# Altium PCB PCB1.PcbDoc
Units mm, origin at the board's own origin, x right, y up, seen from the top; angles counter-clockwise.
Board outline 14.99 x 25.02 mm, 2 copper layers (Top Layer, Bottom Layer); 18 components, 17 nets, 62 pads, 58 vias.
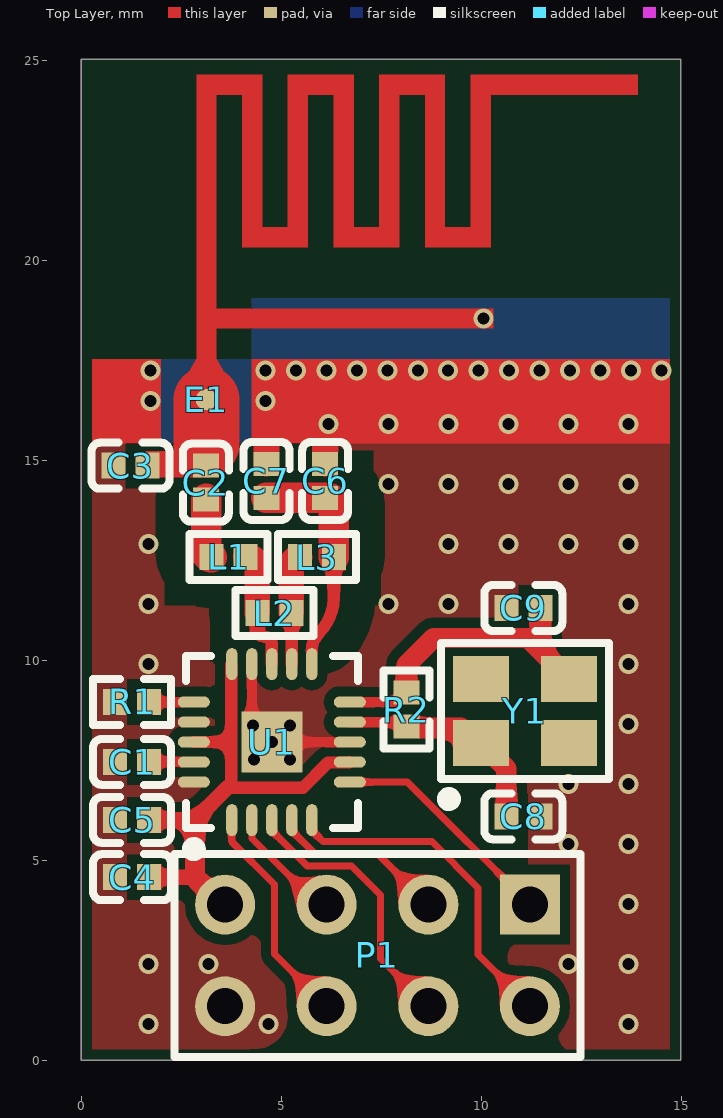
[diagram p0: Top Layer view]
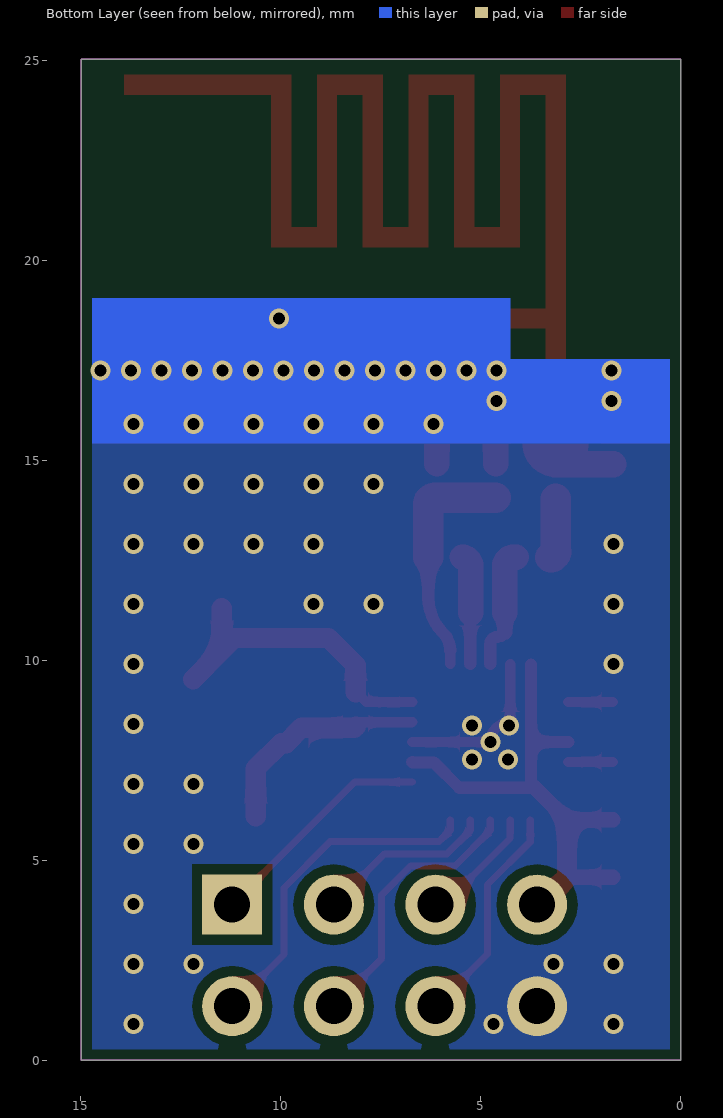
[diagram p1: Bottom Layer view, seen from below]
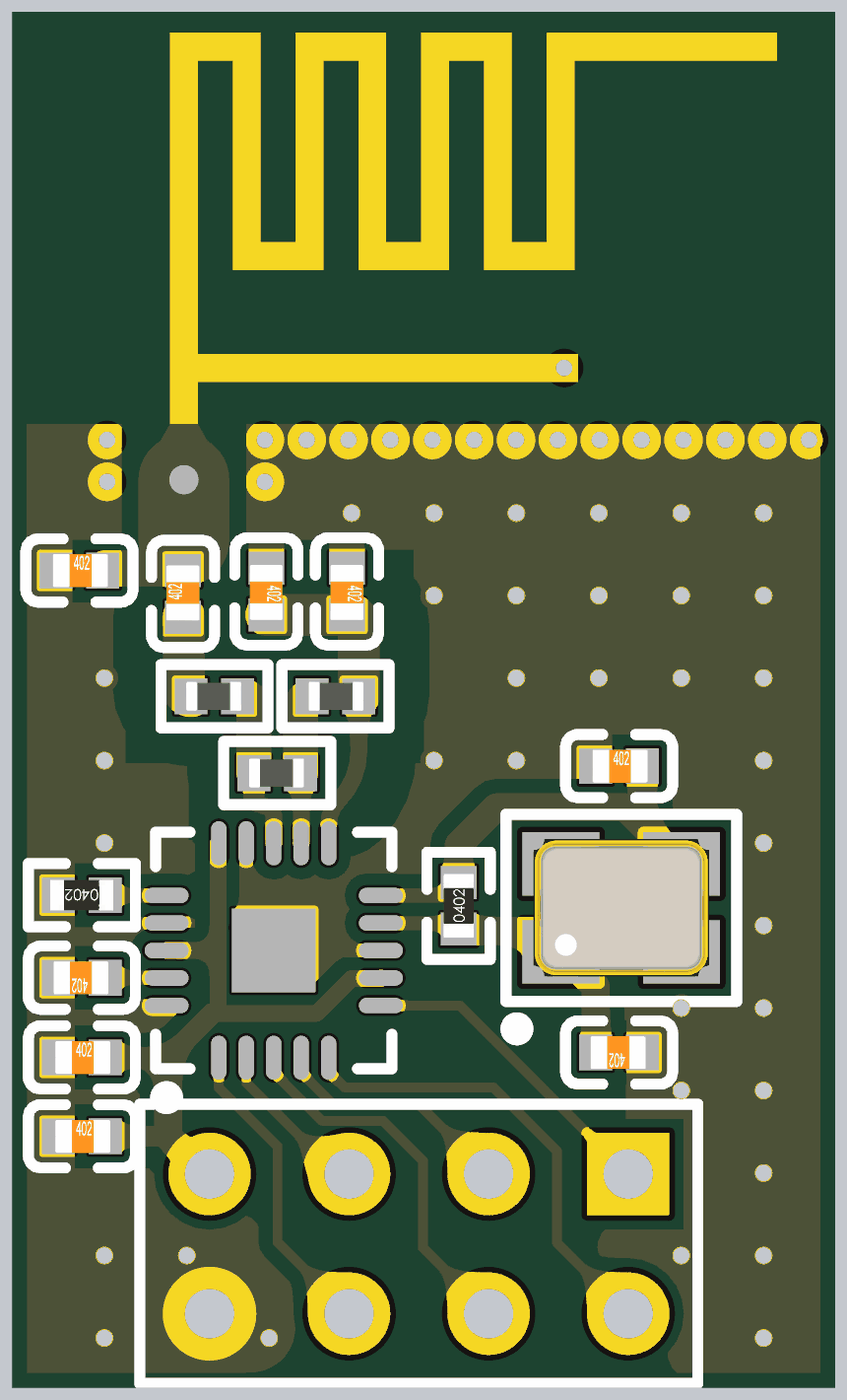
[diagram p2: 3D render of the assembled board from above, using the file's embedded part models]

## Layer stack, top to bottom
Top Solder: solder mask 0.0102, Solder Resist, Dk 3.5
Top Layer: signal copper 0.0356
Dielectric 1: dielectric 0.32, FR-4, Dk 4.8
Bottom Layer: signal copper 0.0356
Bottom Solder: solder mask 0.0102, Solder Resist, Dk 3.5

## Board outline
0,0 0,25.019 14.986,25.019 14.986,0

## Design rules (kind name [scope] priority, off if disabled: settings)
BoardOutlineClearance [All] p1: gap=0.254 ignorepadtopadclearanceinfootprint=FALSE
Clearance 敷铜规则（RF区域） [WithinRoom('RF区域') vs InPolygon] p1: gap=0.889 ignorepadtopadclearanceinfootprint=FALSE
Clearance 敷铜规则 [InPolygon] p2: gap=0.254 ignorepadtopadclearanceinfootprint=FALSE
Clearance [All] p3: gap=0.127 ignorepadtopadclearanceinfootprint=FALSE
ComponentClearance [All] p1 off: gap=0.254 collisioncheckmode=3 verticalgap=0.254 showdistances=FALSE
PolygonConnect [All] p1: connectstyle=Direct reliefconductorwidth=0.254 reliefentries=4 polygonreliefangle="90 Angle" airgapwidth=0.254
RoomDefinition RF区域 [False] p1: confinementstyle=ConfineIn formatcopy=TRUE lockcomponents=FALS outline 1.892,17.488 7.239,17.488 7.239,10.427 1.892,10.427
RoutingVias [All] p1: holewidth=0.711 width=1.27 viastyle="Through Hole" minholewidth=0.711 minwidth=1.27 maxholewidth=0.711 maxwidth=1.27
ShortCircuit 天线模式 [InComponent('E1')] p1: allowed=FA
ShortCircuit [All] p2: allowed=FALSE
SolderMaskExpansion [All] p1: expansion=0.102
Width [All] p1: maxlimit=2.54 minlimit=0.152 preferedwidth=0.254
28 further rules are at their usual default settings.

## Classes and differential pairs
component class "Components Class 1": C2 C6 L1 L2 L3

## Components (designator, comment, footprint, x,y, rotation, side; value= is the part's Value field where it differs from the comment)
C1 "33nF (333) 20% 50V" 0402_C 1.27,7.456 r180 top
C2 "1.5pF (1R5) 0.25pF 50V" 0402_C 3.112,14.434 r90 top
C3 "1pF (1R0) 0.25pF 50V" 0402_C 1.226,14.859 r0 top
C4 "1nF (102) 10% 50V" 0402_C 1.27,4.572 r0 top
C5 "10nF (103) 10% 50V" 0402_C 1.27,6.006 r0 top
C6 "2.2nF (222) 10% 50V" 0402_C 6.096,14.478 r270 top
C7 "4.7pF (4R7) 0.25pF 50V" 0402_C 4.627,14.478 r270 top
C8 "10pF (100) 5% 50V" 0402_C 11.049,6.096 r180 top
C9 "10pF (100) 5% 50V" 0402_C 11.049,11.303 r0 top
E1 "Antenna" MIFA天线 2.81,18.288 r0 top
L1 "3.9nH 3%" 0402_L 3.683,12.573 r180 top
L2 "8.2nH 5%" 0402_L 4.826,11.176 r180 top
L3 "2.7nH 0.3nH" 0402_L 5.886,12.573 r0 top
P1 "Header 4X2" HDR2X4 11.214,3.886 r180 top
R1 "22KΩ (2202) ±1%" 0402_R 1.27,8.956 r180 top
R2 "1MΩ (1004) ±1%" 0402_R 8.128,8.763 r90 top
U1 "NRF24L01P-R" QFN-20_4x4x05P 4.762,7.95 r0 top
Y1 "16MHZ 9PF 10PPM" SMD-3225_4P 11.089,8.725 r0 top

## Footprints (in the part's own frame and the unit in brackets; to place one, negate y for a bottom-side part, rotate by r counter-clockwise, add the part's x,y. Pads: shape width x height; smd on the part's side, far side on the other; paste and mask are expansions set on the pad)
0402_C [mm]
  rect 0.6x0.65 smd mask+0.051: 1(-0.425,0) 2(0.425,0)
  silkscreen extent -0.97,-0.58 0.97,0.58, body extent -0.48,-0.3 0.52,0.3, height 0.2
0402_L [mm]
  rect 0.6x0.65 smd mask+0.051: 1(-0.425,0) 2(0.425,0)
  silkscreen extent -0.97,-0.58 0.97,0.58, body extent -0.51,-0.26 0.54,0.26, height 0.36
0402_R [mm]
  rect 0.6x0.65 smd mask+0.051: 1(-0.425,0) 2(0.425,0)
  silkscreen extent -0.97,-0.58 0.97,0.58, body extent -0.57,-0.27 0.58,0.28, height 0.41
HDR2X4 [mm] "Connector; Header; 4x2 Position"
  rect 1.5x1.5 hole 0.9: 1(0,0)
  round 1.5 hole 0.9: 2(0,2.54) 3(2.54,0) 4(2.54,2.54) 5(5.08,0) 6(5.08,2.54) 7(7.62,0) 8(7.62,2.54)
  silkscreen extent -1.27,-1.27 8.89,3.81
MIFA天线 [mm] "蛇形倒F天线"
  round 0.53 smd paste+0: 1(0.318,-1.778)
  Top Layer region: -2.543,-2.87 -0.813,-2.87 -0.813,-0.762 -2.543,-0.762
  Top Layer region: 1.448,-2.87 11.904,-2.87 11.904,-0.762 1.448,-0.762
  Top Layer region: -0.508,-1.765 -0.508,-2.87 1.143,-2.87 1.143,-1.765
  Top Layer region: 6.286,6.35 5.779,6.35 5.779,2.032 6.286,2.032
  Top Layer region: 4.635,6.35 4.635,5.842 6.286,5.842 6.286,6.35
  Top Layer region: 5.779,2.54 5.779,2.032 7.429,2.032 7.429,2.54
  Top Layer region: 7.429,6.35 6.921,6.35 6.921,2.032 7.429,2.032
  Top Layer region: 1.714,6.35 1.206,6.35 1.206,2.032 1.714,2.032
  Top Layer region: 7.493,0 7.493,0.508 0.559,0.508 0.559,0
  Top Layer region: 0.572,6.35 0.064,6.35 0.064,-0.775 0.572,-0.775
  Top Layer region: 0.064,6.35 0.064,5.842 1.714,5.842 1.714,6.35
  Top Layer region: 1.206,2.54 1.206,2.032 2.857,2.032 2.857,2.54
  Top Layer region: 2.857,6.35 2.349,6.35 2.349,2.032 2.857,2.032
  Top Layer region: 5.143,6.35 4.635,6.35 4.635,2.032 5.143,2.032
  Top Layer region: 3.492,2.54 3.492,2.032 5.143,2.032 5.143,2.54
  Top Layer region: 2.349,6.35 2.349,5.842 4,5.842 4,6.35
  Top Layer region: 4,6.35 3.492,6.35 3.492,2.032 4,2.032
  Top Layer region: 6.921,6.35 6.921,5.842 11.112,5.842 11.112,6.35
  Top Layer region: 0.064,-0.762 -0.508,-1.778 1.143,-1.778 0.572,-0.762
  Bottom Layer region: -2.538,-0.762 1.448,-0.762 1.448,0.762 11.904,0.762 11.904,-2.87 -2.538,-2.87
  Multi-Layer region: 0.064,-0.762
QFN-20_4x4x05P [mm]
  rect 1.524x1.524 smd mask+0.051: 0(0,0)
  oval 0.28x0.8 smd mask+0.051: 1(-1,-1.95) 2(-0.5,-1.95) 3(0,-1.95) 4(0.5,-1.95) 5(1,-1.95) 11(1,1.95) 12(0.5,1.95) 13(0,1.95) 14(-0.5,1.95) 15(-1,1.95)
  oval 0.8x0.28 smd mask+0.051: 6(1.95,-1) 7(1.95,-0.5) 8(1.95,0) 9(1.95,0.5) 10(1.95,1) 16(-1.95,1) 17(-1.95,0.5) 18(-1.95,0) 19(-1.95,-0.5) 20(-1.95,-1)
  silkscreen extent -2.15,-2.82 2.15,2.15
SMD-3225_4P [mm]
  rect 1.4x1.15 smd: 1(-1.1,-0.8) 2(1.1,-0.8) 3(1.1,0.8) 4(-1.1,0.8)
  silkscreen extent -2.1,-2.35 2.1,1.7, body extent -1.6,-1.25 1.6,1.25, height 0.61

## Part data
C1: library part "0402 33nF (333) 20% 50V", "贴片电容", Package=0402, SuppliersPartNumber=C1585, ComponentLink1Description=供应商, ComponentLink1URL=http://www.szlcsc.com/product/details_1937.html, Supplier=LC
C2: library part "0402 1.5pF (1R5) 0.25pF 50V", "贴片电容", Package=0402, SuppliersPartNumber=C1552, ComponentLink1Description=供应商, ComponentLink1URL=http://www.szlcsc.com/product/details_1904.html, Supplier=LC
C3: library part "0402 1pF (1R0) 0.25pF 50V", "贴片电容", Package=0402, SuppliersPartNumber=C1550, ComponentLink1Description=供应商, ComponentLink1URL=http://www.szlcsc.com/product/details_1902.html, Supplier=LC
C4: library part "0402 1nF (102) 10% 50V", "贴片电容", Package=0402, SuppliersPartNumber=C1523, ComponentLink1Description=供应商, ComponentLink1URL=http://www.szlcsc.com/product/details_1875.html, Supplier=LC
C5: library part "0402 10nF (103) 10% 50V", "贴片电容", Package=0402, SuppliersPartNumber=C15195, ComponentLink1Description=供应商, ComponentLink1URL=http://www.szlcsc.com/product/details_15869.html, Supplier=LC
C6: library part "0402 2.2nF (222) 10% 50V", "贴片电容", Package=0402, SuppliersPartNumber=C1531, ComponentLink1Description=供应商, ComponentLink1URL=http://www.szlcsc.com/product/details_1883.html, Supplier=LC
C7: library part "0402 4.7pF (4R7) 0.25pF 50V", "贴片电容", Package=0402, SuppliersPartNumber=C1569, ComponentLink1Description=供应商, ComponentLink1URL=http://www.szlcsc.com/product/details_1921.html, Supplier=LC
C8 C9: library part "0402 10pF (100) 5% 50V", "贴片电容", Package=0402, SuppliersPartNumber=C32949, ComponentLink1Description=供应商, ComponentLink1URL=http://www.szlcsc.com/product/details_33914.html, Supplier=LC
E1: "Generic Antenna", LatestRevisionDate=17-Jul-2002, LatestRevisionNote="Re-released for DXP Platform.", PackageReference=PIN1, Published=24-Mar-1999, Publisher="Altium Limited"
L1: library part "0402 3.9nH 3%", "贴片电感", Package=0402, SuppliersPartNumber=C14033, ComponentLink1Description=供应商, ComponentLink1URL=http://www.szlcsc.com/product/details_14690.html, Supplier=LC
L2: library part "0402 8.2nH 5%", "贴片电感", Package=0402, SuppliersPartNumber=C16208, ComponentLink1Description=供应商, ComponentLink1URL=http://www.szlcsc.com/product/details_16890.html, Supplier=LC
L3: library part "0402 2.7nH 0.3nH", "贴片电感", Package=0402, SuppliersPartNumber=C27123, ComponentLink1Description=供应商, ComponentLink1URL=http://www.szlcsc.com/product/details_27872.html, Supplier=LC
P1: "Header, 4-Pin, Dual row", LatestRevisionDate=17-Jul-2002, LatestRevisionNote="Re-released for DXP Platform.", Publisher="Altium Limited"
R1: library part "0402 22KΩ (2202) 1%", "贴片电阻", Package=0402, SuppliersPartNumber=C25768, ComponentLink1Description=供应商, ComponentLink1URL=http://www.szlcsc.com/product/details_26511.html, Supplier=LC
R2: library part "0402 1MΩ (1004) 1%", "贴片电阻", Package=0402, SuppliersPartNumber=C26083, ComponentLink1Description=供应商, ComponentLink1URL=http://www.szlcsc.com/product/details_26826.html, Supplier=LC
U1: library part NRF24L01P-R_[C8791], "无线", Package=QFN-20_4x4x05P, SuppliersPartNumber=C8791, ComponentLink1Description=供应商, ComponentLink1URL=http://www.szlcsc.com/product/details_9305.html, Supplier=LC
Y1: library part "SMD-3225_4P  16MHZ 9PF 10PPM", "贴片晶振", Package=SMD-3225_4P, SuppliersPartNumber=C13738, ComponentLink1Description=供应商, ComponentLink1URL=http://www.szlcsc.com/product/details_14393.html, Supplier=LC

## Via types
v1: diameter 0.5, hole 0.3, Top Layer to Bottom Layer, tented both sides, 35 vias
v2: diameter 0.5, hole 0.3, Top Layer to Bottom Layer, 23 vias

## Nets (pads, with @x,y where several pads share a name; then routed paths per layer and width w, separated by ;. In a path a pad name is that pad's centre, name@x,y a point inside that pad or via, vN(x,y) a via of type N, cw(c..) or ccw(c..) an arc to the next point about the centre after c; other vN are vias at no path point)
CE: P1.6 U1.1 | length 5.6
  Top Layer w0.178: U1.1 3.762,5.458 4.832,4.389 4.832,2.649 P1.6
CSE: P1.5 U1.2 | length 3
  Top Layer w0.178: U1.2 4.262,5.673 4.266,5.669 4.266,5.538 5.918,3.886 P1.5
GND: C1.2 C3.1 C4.1 C5.1 C6.1 C7.1 C8.1 C9.1 P1.8 R1.2 U1.0 U1.8 U1.14 U1.17 U1.20 | length 6.3
  Top Layer w0.254: U1.14 U1.0@4.262,8.45 ; v2(4.293,8.369) 4.262,8.399 U1.0@4.262,8.45 ; U1.8 v2(4.763,7.95) ccw(c4.263,7.95) U1.0@4.263,8.45
  Top Layer w0.635: 4.601,15.904 cw(c4.601,15.877) 4.628,15.877 C7.1 ; C6.1 v1@6.096,15.877
  other v1: 1.68,0.904 4.68,0.904 13.68,0.904 1.68,2.404 3.18,2.404 12.18,2.404 13.68,2.404 13.68,3.904 12.18,5.404 13.68,5.404 12.18,6.904 13.68,6.904 13.68,8.404 1.68,9.904 13.68,9.904 1.68,11.404 7.68,11.404 9.18,11.404 13.68,11.404 1.68,12.904 9.18,12.904 10.68,12.904 12.18,12.904 13.68,12.904 7.68,14.404 9.18,14.404 10.68,14.404 12.18,14.404 13.68,14.404 6.18,15.904 7.68,15.904 9.18,15.904 10.68,15.904 12.18,15.904 13.68,15.904
  other v2: 4.318,7.518 5.22,7.518 5.22,8.369 1.73,16.472 4.601,16.472 1.73,17.234 4.601,17.234 5.363,17.234 6.125,17.234 6.887,17.234 7.649,17.234 8.411,17.234 9.173,17.234 9.935,17.234 10.697,17.234 11.459,17.234 12.221,17.234 12.983,17.234 13.745,17.234 14.507,17.234 10.049,18.542
IRQ: P1.1 U1.6 | length 5.8
  Top Layer w0.178: U1.6 8.15,6.95 P1.1
MISO: P1.2 U1.5 | length 8.5
  Top Layer w0.178: U1.5 5.762,5.744 6.044,5.462 7.53,5.462 ; 7.53,5.461 8.763,5.461 9.919,4.305 9.919,2.642 P1.2
MOSI: P1.3 U1.4 | length 4.4
  Top Layer w0.178: U1.4 5.262,5.736 5.841,5.157 7.403,5.157 P1.3
NetC1_1: C1.1 U1.19 | length 1.1
  Top Layer w0.254: C1.1 2.807,7.456 U1.19
NetC2_1: C2.1 L1.2 | length 1.5
  Top Layer w0.762: L1.2@3.113,12.718 ccw(c3.258,12.718) L1.2 ; L1.2@3.124,12.718 C2.1@3.124,14.034
NetC2_2: C2.2 C3.2 E1.1 | length 2.6
  Top Layer w0.66: C3.2@1.689,14.897 C2.2@3.15,14.897
  Top Layer w0.762: E1.1@3.111,16.494 E1.1
  Top Layer w1.651: 3.127,15.404 E1.1
NetC6_2: C6.2 C7.2 L3.2 U1.11 | length 5.9
  Top Layer w0.254: U1.11 U1.11@5.762,10.243
  Top Layer w0.305: U1.11@5.762,10.243 cw(c6.381,10.243) 5.944,10.681 ccw(c5.057,11.568) 6.311,11.568 L3.2
  Top Layer w0.762: C7.2 C6.2 6.162,14.053 cw(c6.162,13.904) 6.311,13.904 L3.2
NetC8_2: C8.2 R2.1 U1.9 Y1.1 | length 5.6
  Top Layer w0.254: U1.9 6.717,8.445 8.021,8.445 R2.1
  Top Layer w0.508: R2.1 8.16,8.306 9.483,8.306 9.864,7.925 Y1.1 10.624,7.29 C8.2
NetC9_2: C9.2 R2.2 U1.10 Y1.3 | length 8
  Top Layer w0.254: U1.10 7.865,8.95 8.103,9.188 R2.2
  Top Layer w0.508: R2.2 8.128,9.868 8.814,10.554 11.16,10.554 11.474,10.24 ; C9.2 11.474,10.24 ; Y1.3 11.474,10.24
NetL1_1: L1.1 L2.2 U1.13 | length 3.1
  Top Layer w0.254: 4.401,10.693 ccw(c4.515,10.693) 4.515,10.579 4.585,10.579
  Top Layer w0.305: 4.585,10.579 cw(c4.585,10.401) 4.763,10.401 U1.13
  Top Layer w0.381: 4.401,10.693 L2.2
  Top Layer w0.635: L1.1 4.191,12.573 cw(c4.191,12.363) 4.401,12.363 L2.2
NetL2_1: L2.1 L3.1 U1.12 | length 2.9
  Top Layer w0.254: L2.1 cw(c5.251,11.101) 5.326,11.101 ccw(c5.326,11.037) L2.1@5.262,11.037
  Top Layer w0.305: U1.12 L2.1@5.262,11.037
  Top Layer w0.635: L2.1 5.251,12.363 cw(c5.461,12.363) L3.1
NetR1_1: R1.1 U1.16 | length 1.1
  Top Layer w0.254: R1.1 1.695,8.95 U1.16
SCK: P1.4 U1.3 | length 6.9
  Top Layer w0.178: U1.3 4.763,5.737 5.647,4.852 6.756,4.852 7.478,4.13 7.478,2.543 P1.4
VCC: C4.2 C5.2 P1.7 U1.7 U1.15 U1.18 | length 13.3
  Top Layer w0.254: 3.645,6.807 3.746,6.807 ; U1.15@3.746,9.884 U1.15
  Top Layer w0.305: U1.18 3.746,7.95 ; U1.15@3.746,9.884 3.746,7.95 ; U1.7 6.7,7.438 6.169,7.438 5.539,6.807 3.746,6.807 3.746,7.95
  Top Layer w0.381: C4.2 2.832,4.572 2.844,4.56 ; C5.2 2.844,6.006 3.645,6.807
  Top Layer w0.508: 2.844,6.006 2.844,4.56 P1.7@3.556,3.848
pads on no net: Y1.2 Y1.4

## Polygon pours and split planes (outlines as drawn)
GND on Top Layer "Top Layer-GND" (solid, remove dead copper, pour order 10): 0.038,15.418 14.935,15.418 14.935,0 0,0 0,0.013
no net on Top Layer "Top Layer-No Net" (solid, remove dead copper, pour order 2): 2.302,15.418
no net on Top Layer "Top Layer-No Net 1" (solid, remove dead copper, pour order 0): 2.302,15.418
GND on Bottom Layer "Bottom Layer-GND" (solid, remove dead copper, pour order 12): 0.038,15.418 14.935,15.418 14.935,0 0.038,0

## Keep-outs
Keep-Out Layer:
  the board outline again, w0.025

## Other copper
Top Layer:
  pour cut-out: 2.595,12.718 2.595,12.34 ccw(c2.84,12.34) 2.935,12.114 ccw(c2.957,12.089) 2.957,12.055 3.882,12.055 ccw(c3.882,12.121) 3.948,12.121 ccw(c3.902,12.121) 3.902,12.167 2.887,12.167 cw(c2.887,12.223) 2.831,12.223 ccw(c2.831,12.287) 2.896,12.287 2.896,12.649 ccw(c2.756,12.649) 2.756,12.789
  pour cut-out: 3.974,10.724 cw(c3.812,10.724) 3.812,10.562 3.762,10.562 ccw(c3.864,10.562) 3.864,10.461 4.022,10.461 ccw(c4.022,10.541) 4.102,10.541 4.102,10.728 ccw(c4.022,10.728) 4.022,10.808
  pour cut-out: 11.178,5.517 11.171,5.517 11.171,4.89 11.062,4.89 11.062,5.57 ccw(c11.044,5.57) 11.044,5.588
  pour cut-out: 7.014,8.057 7.02,8.057 cw(c7.02,7.95) 7.126,7.95 7.126,7.846 cw(c7.014,7.846) 7.014,7.734 ccw(c7.014,7.846) 7.126,7.846 7.126,8.128
  pour cut-out: 11.1,2.996 11.086,2.996 ccw(c11.086,2.565) 10.655,2.565 ccw(c11.049,2.565) 11.049,2.172 10.731,2.172 cw(c10.731,2.553) 10.351,2.553 10.351,2.959 cw(c10.414,2.959) 10.414,3.023
  pour cut-out: 11.93,0.63 ccw(c12.395,0.63) 12.395,0.165 11.176,0.165 cw(c11.176,0.216) 11.125,0.216
  pour cut-out: 5.156,1.084 cw(c4.351,1.084) 4.351,0.279 6.13,0.279 cw(c6.13,0.241) 6.168,0.241
  pour cut-out: 4.509,2.515 4.509,2.819 ccw(c4.191,2.819) 4.191,3.137 3.785,3.137 cw(c3.988,3.137) 3.988,3.34 4.534,3.34
  pour cut-out: 11.049,2.87
  pour cut-out: 11.049,2.87
  pour cut-out: 5.182,1.575
  pour cut-out: 5.159,1.638
  pour cut-out: 5.105,1.587
  pour cut-out: 5.156,1.084
  pour cut-out: 5.461,0.762
  pour cut-out: 5.321,0.724
  pour cut-out: 5.182,1.575
  pour cut-out: 5.105,1.587
  pour cut-out: 2.249,3.993 2.249,3.988 2.667,3.988 2.667,4.191 2.235,4.191
  pour cut-out: 4.258,15.418 4.258,14.48 4.216,14.48 4.216,15.418

## Silkscreen, mask and mechanical layers (free items; w line width, h text height)
Mechanical 1:
  the board outline again, w0.025